# EAGLE board brains (EAGLE 7.3.0)
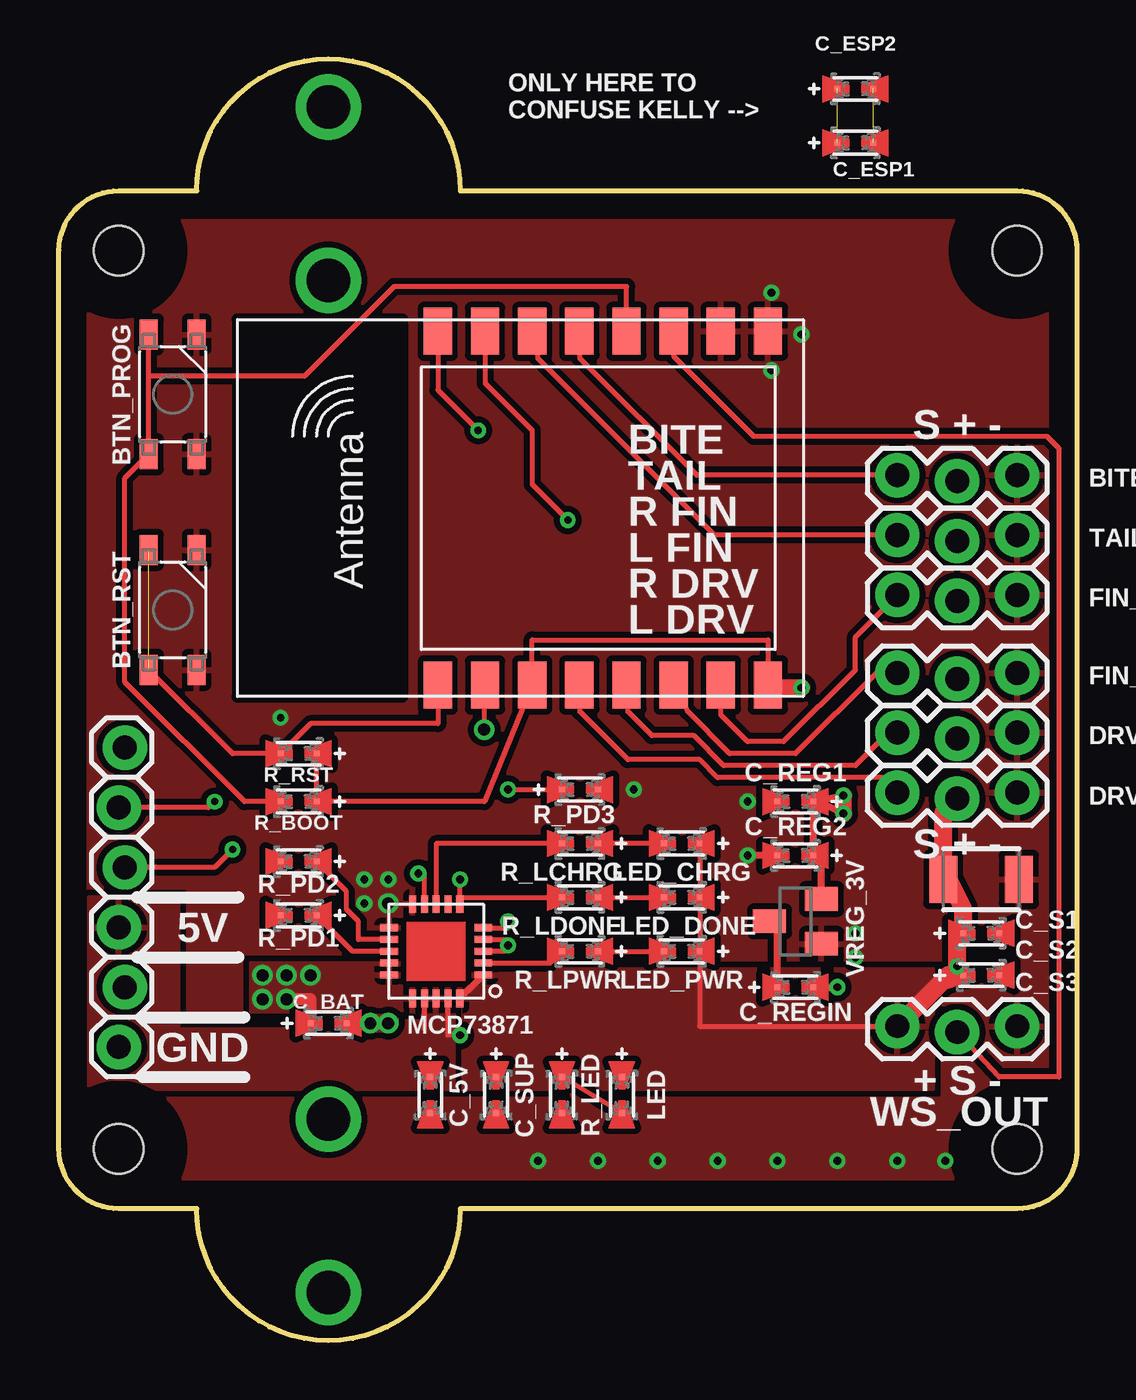
[diagram p0: board, top side]
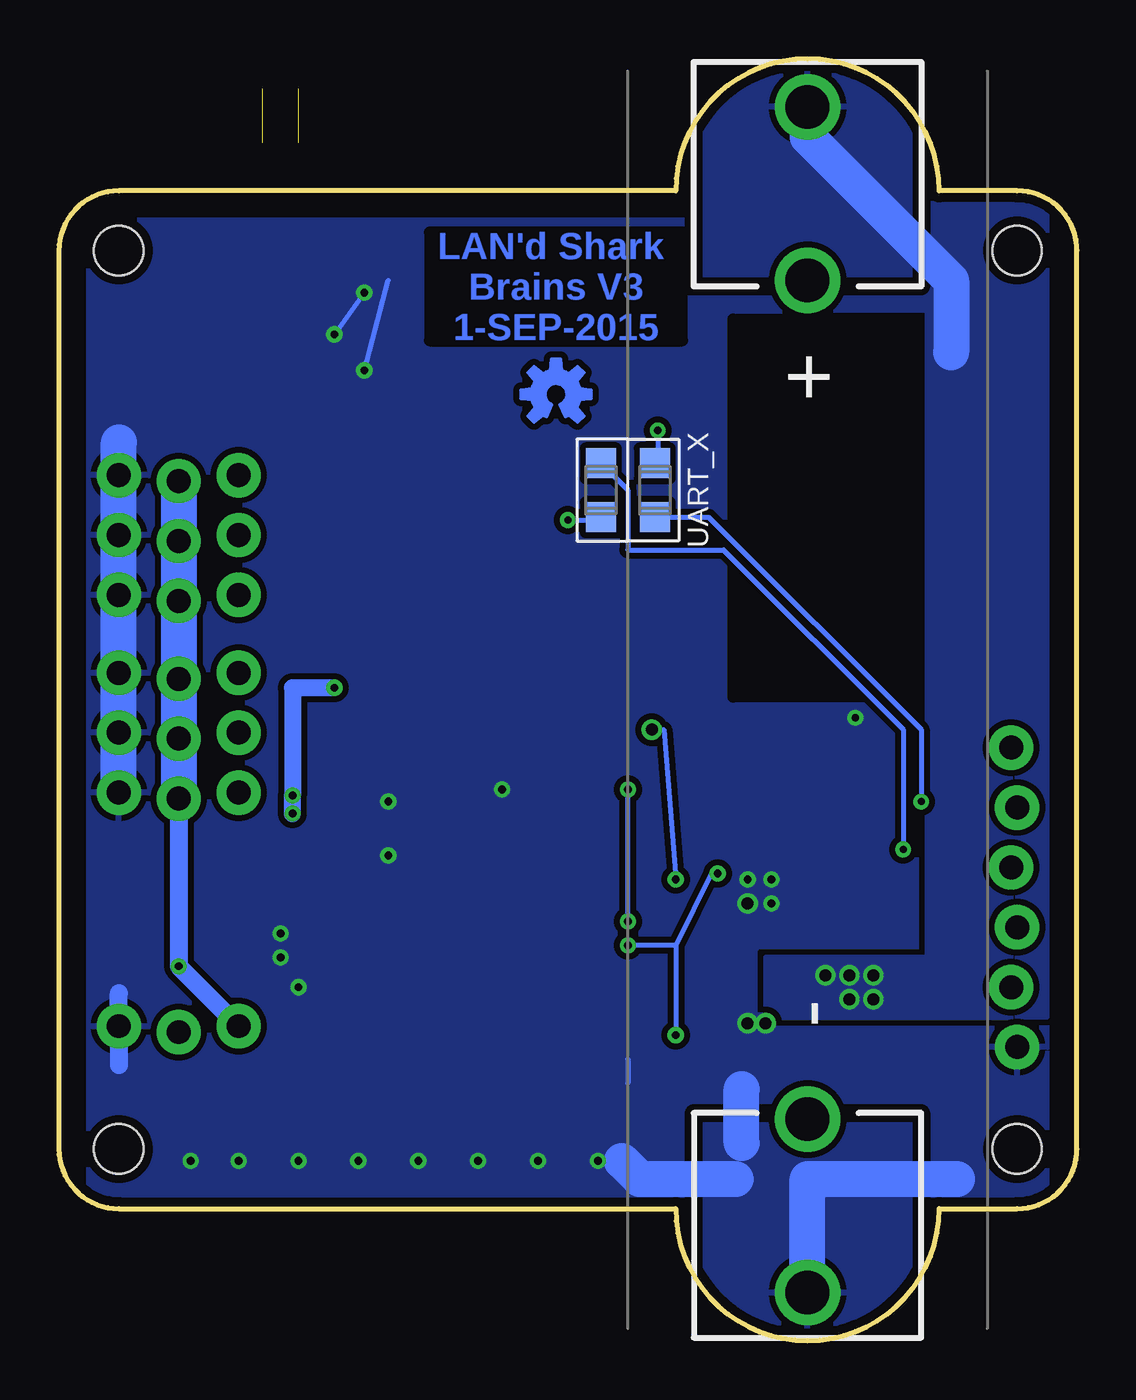
[diagram p1: board, bottom side, seen from below]

Size 43.18 x 54.36 mm. Coordinates in mm from the lower left corner, seen from the top.
Outline: 5.84,5.59 2.54,5.59 arc-90 0,8.13 0,46.23 arc-90 2.54,48.77 5.84,48.77 arc-90 11.43,54.36 arc-90 17.02,48.77 40.64,48.77 arc-90 43.18,46.23 43.18,8.13 arc-90 40.64,5.59 17.02,5.59 arc-90 11.43,0 arc-90 5.84,5.59
Copper layers (1*16): Top 0.0356mm / dielectric 1.5011mm / Bottom 0.0356mm
Design rules "LaenPCBOrder-tented": minimum track width 6mil, minimum drill 13mil, track to track 6mil, track to pad 6mil, pad to pad 6mil, via to via 6mil, smd to smd 0mil, copper to edge 15mil, drill to drill 6mil, minimum pad ring 7mil, minimum via ring 7mil, stop-mask expansion 4mil, vias tented up to drill 25mil, thermal gap 10mil
Holes 2.1 mm at 2.54,8.13 40.64,8.13 2.54,46.23 40.64,46.23
tRestrict: area 38.1,5.6 to 43.2,10.7; area 0,5.6 to 5.1,10.7; area 0,43.7 to 5.1,48.8; area 38.1,43.7 to 43.2,48.8

## Footprints (pad centres in the part's own frame; a part is rotated, then mirrored left to right if it is on the bottom)
BATTERY-AA = drill 1.854: GND@1 25.146,0; GND@2 17.78,0; PWR@1 -25.146,0; PWR@2 -17.78,0
1X03_LOCK = drill 1.016 pad 1.88: 1 0,0.127; 2 2.54,-0.127; 3 5.08,0.127
BUTTON-PJRC = smd 1.27 x 0.762: A1 -2.54,-1.016; A2 2.54,-1.016; B1 -2.54,1.016; B2 2.54,1.016
0402-0603-0805-UNIVERSAL = smd 0.254 x 0.254: + -0.762,0; - 0.762,0
1210 = smd 1.2 x 2: 1 -1.6,0; 2 1.6,0
1X06_LOCK = drill 1.016 pad 1.88: 1 0,0; 2 2.54,-0.254; 3 5.08,0; 4 7.62,-0.254; 5 10.16,0; 6 12.7,-0.254
QFN20 = smd 0.75 x 0.3: 1 -2,1; 2 -2,0.5; 3 -2,0; 4 -2,-0.5; 5 -2,-1; 11 2,-1; 12 2,-0.5; 13 2,0; 14 2,0.5; 15 2,1 | smd 0.3 x 0.75: 6 -1,-2; 7 -0.5,-2; 8 0,-2; 9 0.5,-2; 10 1,-2; 16 1,2; 17 0.5,2; 18 0,2; 19 -0.5,2; 20 -1,2
UART_SWITCHER_0603 = smd 1.27 x 1.27: RX_A -1.143,-1.143; RX_B -1.143,1.143; TX_A 1.143,1.143; TX_B 1.143,-1.143
SOT23 = smd 1 x 1.4: 1 -0.95,-1.1; 2 0.95,-1.1; 3 0,1.1
ESP-12 = smd 2 x 1.2: 1 -7.5,4.5; 2 -7.5,2.5; 3 -7.5,0.5; 4 -7.5,-1.5; 5 -7.5,-3.5; 6 -7.5,-5.5; 7 -7.5,-7.5; 8 -7.5,-9.5; 9 7.5,-9.5; 10 7.5,-7.5; 11 7.5,-5.5; 12 7.5,-3.5; 13 7.5,-1.5; 14 7.5,0.5; 15 7.5,2.5; 16 7.5,4.5

## Placement (x,y rotation side)
BAT2  [BATTERY-AA]  11.43,27.18 270 bottom
BITE  [1X03_LOCK]  35.56,36.58 0 top
BTN_PROG  BUTTONPJRC  [BUTTON-PJRC]  4.83,40.13 270 top
BTN_RST  BUTTONPJRC  [BUTTON-PJRC]  4.83,30.99 270 top
C_5V  10uF  [0402-0603-0805-UNIVERSAL]  15.75,10.41 270 top
C_BAT  10uF  [0402-0603-0805-UNIVERSAL]  11.43,13.46 0 top
C_ESP1  1uF  [0402-0603-0805-UNIVERSAL]  33.78,50.8 0 top
C_ESP2  0.1uF  [0402-0603-0805-UNIVERSAL]  33.78,53.09 0 top
C_REG1  10uF  [0402-0603-0805-UNIVERSAL]  31.24,22.86 180 top
C_REG2  1uF  [0402-0603-0805-UNIVERSAL]  31.24,20.57 180 top
C_REGIN  10uF  [0402-0603-0805-UNIVERSAL]  31.24,14.99 0 top
C_S1  220uF  [1210]  39.12,19.56 180 top
C_S2  10uF  [0402-0603-0805-UNIVERSAL]  39.12,17.27 0 top
C_S3  .1uF  [0402-0603-0805-UNIVERSAL]  39.12,15.49 0 top
C_SUP  10uF  [0402-0603-0805-UNIVERSAL]  18.54,10.41 270 top
DRV_L  [1X03_LOCK]  35.56,23.11 0 top
DRV_R  [1X03_LOCK]  35.56,25.65 0 top
FIN_L  [1X03_LOCK]  35.56,28.19 0 top
FIN_R  [1X03_LOCK]  35.56,31.5 0 top
FTDI  [1X06_LOCK]  2.79,25.15 270 top
IC_LIPO  MCP73871  [QFN20]  16,16.51 180 top
LED  [0402-0603-0805-UNIVERSAL]  23.88,10.41 270 top
LED_CHRG  [0402-0603-0805-UNIVERSAL]  26.42,21.08 180 top
LED_DONE  [0402-0603-0805-UNIVERSAL]  26.42,18.8 180 top
LED_PWR  [0402-0603-0805-UNIVERSAL]  26.42,16.51 180 top
LOGO1  OSHW-LOGOS  [OSHW-LOGO-S]  22.1,40.13 0 bottom
R_BOOT  [0402-0603-0805-UNIVERSAL]  10.16,22.86 180 top
R_LCHRG  [0402-0603-0805-UNIVERSAL]  22.1,21.08 180 top
R_LDONE  [0402-0603-0805-UNIVERSAL]  22.1,18.8 180 top
R_LED  [0402-0603-0805-UNIVERSAL]  21.34,10.41 270 top
R_LPWR  [0402-0603-0805-UNIVERSAL]  22.1,16.51 180 top
R_PD1  2k  [0402-0603-0805-UNIVERSAL]  10.16,18.03 180 top
R_PD2  100k  [0402-0603-0805-UNIVERSAL]  10.16,20.32 180 top
R_PD3  150k  [0402-0603-0805-UNIVERSAL]  22.1,23.37 0 top
R_RST  [0402-0603-0805-UNIVERSAL]  10.16,24.89 180 top
TAIL  [1X03_LOCK]  35.56,34.04 0 top
UART_X  UART_SWITCHER0603  [UART_SWITCHER_0603]  19.05,36.07 270 bottom
VREG_3V  MC1700T-3v0  [SOT23]  31.24,17.78 90 top
WS_OUT  [1X03_LOCK]  35.56,13.21 0 top
X1  [ESP-12]  20.57,35.31 90 top

## Library data of the parts
BAT2 = SparkFun-Electromechanical
BITE DRV_L DRV_R FIN_L FIN_R FTDI TAIL WS_OUT = SparkFun-Connectors
BTN_PROG BTN_RST C_5V C_BAT C_ESP1 C_ESP2 C_REG1 C_REG2 C_REGIN C_S1-C_S3 C_SUP LED LED_CHRG LED_DONE LED_PWR LOGO1 R_BOOT R_LCHRG R_LDONE R_LED R_LPWR R_PD1-R_PD3 R_RST UART_X VREG_3V = tekdemo
IC_LIPO X1 = adafruit

## Nets
3.0V: C_REG1.+ C_REG2.+ R_BOOT.+ R_RST.+ VREG_3V.2 X1.3 X1.8
4: TAIL.1 X1.14
5: BITE.1 X1.13
5V: C_5V.+ FTDI.4 IC_LIPO.3 IC_LIPO.4 IC_LIPO.9 IC_LIPO.17 IC_LIPO.18 IC_LIPO.19
12: FIN_L.1 X1.6
13: FIN_R.1 X1.7
14: DRV_R.1 X1.5
16: DRV_L.1 X1.4
BLINKY: WS_OUT.2 X1.11
BOOTLOADER: BTN_PROG.A1 BTN_PROG.A2 R_BOOT.- X1.12
CHARGE_DONE: IC_LIPO.6 R_LDONE.- X1.2
DTR: FTDI.1
ESP_RX_I: UART_X.TX_B X1.15
ESP_TX_O: UART_X.RX_B X1.16
FTDI_RX_I: FTDI.3 UART_X.RX_A
FTDI_TX_0: FTDI.2 UART_X.TX_A
GND: BAT2.GND@1 BITE.3 BTN_PROG.B1 BTN_PROG.B2 BTN_RST.B1 BTN_RST.B2 C_5V.- C_BAT.- C_REG1.- C_REG2.- C_REGIN.- C_S1.1 C_S2.- C_S3.- C_SUP.- DRV_L.3 DRV_R.3 FIN_L.3 FIN_R.3 FTDI.6 IC_LIPO.10 IC_LIPO.11 R_LED.- R_PD1.- R_PD2.- R_PD3.- TAIL.3 VREG_3V.1 WS_OUT.3 X1.9 X1.10
N$1: IC_LIPO.8 R_LCHRG.-
N$3: C_ESP1.- C_ESP2.-
N$4: IC_LIPO.5 R_PD3.+
N$5: LED_CHRG.- R_LCHRG.+
N$6: LED.- R_LED.+
N$7: LED_DONE.- R_LDONE.+
N$8: LED_PWR.- R_LPWR.+
N$9: IC_LIPO.2 R_LPWR.-
N$10: C_ESP1.+ C_ESP2.+
N$20: IC_LIPO.7
N$22: IC_LIPO.12 R_PD2.+
N$23: IC_LIPO.13 R_PD1.+
RESET: BTN_RST.A1 BTN_RST.A2 R_RST.- X1.1
VBAT: BAT2.PWR@1 C_BAT.+ IC_LIPO.14 IC_LIPO.15 IC_LIPO.16
VSUPPLY: BITE.2 C_REGIN.+ C_S1.2 C_S2.+ C_S3.+ C_SUP.+ DRV_L.2 DRV_R.2 FIN_L.2 FIN_R.2 IC_LIPO.1 IC_LIPO.20 LED.+ LED_CHRG.+ LED_DONE.+ LED_PWR.+ TAIL.2 VREG_3V.3 WS_OUT.1

## Tracks (layer width: path | path; a pad name or v marks a point on that pad's centre or on a via)
3.0V  (via drill 0.33)
  Top 0.203: R_RST.+ R_BOOT.+ 18.04,22.86 X1.3 20.07,29.72 30.07,29.72 X1.8
  Top 0.305: VREG_3V.2 32.34,20.24 C_REG2.+ C_REG1.+ 32.26,22.86 | 32.26,22.86 v33.27,22.35 | v33.27,23.11 32.26,22.86
  Top 0.711: v33.27,22.35 v33.27,23.11 | v31.5,27.69 30.19,27.69 X1.8
  Bottom 0.711: v31.5,27.69 33.27,27.69 v33.27,23.11 v33.27,22.35
4
  Top 0.203: TAIL.1 27.81,34.16 20.32,41.66 20.32,42.56 X1.14
5
  Top 0.203: BITE.1 27.05,36.7 22.1,41.66 22.1,42.78 X1.13
5V  (via drill 0.33)
  Top 0.203: IC_LIPO.9 15.5,19.8 v15.24,19.81 | IC_LIPO.3 19.05,16.51 v19.05,16.76 19.05,17.01 IC_LIPO.4 | v17.02,12.95 16.5,12.95 IC_LIPO.19 | IC_LIPO.17 15.49,13.21
  Bottom 0.203: v15.24,19.81 15.49,19.81 17.02,16.76 | 17.02,16.76 v19.05,16.76 | 17.02,16.76 v17.02,12.95
  pour Top (isolate 0.254, rank 3): 16.76,15.24 14.73,15.24 14.73,13.21 5.08,13.21 5.08,18.8 1.27,18.8 1.27,10.67 16.76,10.67
12
  Top 0.203: FIN_L.1 34.67,28.32 31.24,24.89 28.45,24.89 26.67,26.67 X1.6
13
  Top 0.203: FIN_R.1 33.78,29.84 33.78,28.45 30.73,25.4 29.21,25.4 28.07,26.54 X1.7
14
  Top 0.203: DRV_R.1 35.18,25.78 33.78,24.38 28.19,24.38 26.92,25.65 25.15,25.65 24.13,26.67 24.13,27.75 X1.5
16
  Top 0.203: X1.4 22.1,27.78 22.1,26.67 24.13,24.64 27.18,24.64 27.94,23.88 34.93,23.88 DRV_L.1
BLINKY
  Top 0.203: X1.11 26.07,41.74 29.46,38.35 41.91,38.35 42.42,37.85 42.42,11.18 39.88,11.18 WS_OUT.2
BOOTLOADER
  Top 0.203: 3.81,40.89 BTN_PROG.A2 2.79,36.58 2.79,27.94 7.87,22.86 R_BOOT.- | 3.81,40.89 BTN_PROG.A1 | X1.12 24.07,44.7 14.22,44.7 10.41,40.89 3.81,40.89
CHARGE_DONE  (via drill 0.33, 0.51)
  Top 0.203: R_LDONE.- 17,18.8 IC_LIPO.6 17,19.56 v17.02,19.56 | X1.2 18.03,27.81 v18.03,25.91
  Bottom 0.203: v18.03,25.91 17.53,25.91 v17.02,19.56
ESP_RX_I  (via drill 0.3)
  Top 0.203: X1.15 18.07,40.6 20.07,38.61 20.07,36.32 v21.59,34.8
  Bottom 0.203: v21.59,34.8 20.32,34.8 UART_X.TX_B
ESP_TX_O  (via drill 0.3)
  Top 0.203: X1.16 16.07,40.31 v17.78,38.61
  Bottom 0.203: v17.78,38.61 17.78,37.34 UART_X.RX_B
FTDI_RX_I  (via drill 0.3)
  Top 0.203: v7.37,20.83 6.6,20.07 FTDI.3
  Bottom 0.203: UART_X.RX_A 19.05,36.07 19.05,33.53 14.99,33.53 7.37,25.91 v7.37,20.83
FTDI_TX_0  (via drill 0.3)
  Top 0.203: v6.6,22.86 6.35,22.61 FTDI.2
  Bottom 0.203: UART_X.TX_A 15.62,34.93 6.6,25.91 v6.6,22.86
GND  (via drill 0.3, 0.33, 0.51)
  Top 0.203: X1.9 29.97,42.81
  Top 0.305: C_REG2.- v29.21,20.57 | C_REGIN.- v33.02,14.99
  Top 0.508: v13.21,13.46 C_BAT.- v13.97,13.46
  Bottom 0.203: 19.05,11.94 19.05,10.92 | v31.5,42.67 v30.23,44.45 | v30.23,41.15 29.21,44.96
  Bottom 0.762: 40.64,11.68 WS_OUT.3 40.64,14.73
  Bottom 1.524: 40.64,23.11 40.64,38.1 | 19.3,7.62 18.54,6.86 14.48,6.86 | BAT2.GND@1 11.43,6.86 5.08,6.86 | 14.22,8.38 14.22,10.67
  other vias: 13.97,18.54 20.32,7.62 22.86,7.62 25.4,7.62 27.94,7.62 30.48,7.62 33.02,7.62 35.56,7.62 37.59,7.62 12.95,19.56 13.97,19.56 12.95,18.54 24.38,23.37 29.21,22.86 33.78,17.27 33.78,16.26 9.4,26.42
  pour Top (isolate 0.254, rank 6): 1.27,6.86 1.27,47.5 41.91,47.5 41.91,6.86
  pour Bottom (isolate 0.254, rank 6): 1.27,0.51 1.27,47.5 41.91,47.5 41.91,0.51
N$1
  Top 0.203: R_LCHRG.- 16,21.08 IC_LIPO.8
N$3  (1 unrouted)
N$4  (via drill 0.33)
  Top 0.203: IC_LIPO.5 19.05,17.51 v19.05,17.78 | v19.05,23.37 R_PD3.+
  Bottom 0.203: v19.05,17.78 v19.05,23.37
N$5
  Top 0.203: LED_CHRG.- R_LCHRG.+
N$6
  Top 0.203: LED.- R_LED.+
N$7
  Top 0.203: R_LDONE.+ LED_DONE.-
N$8
  Top 0.203: R_LPWR.+ LED_PWR.-
N$9
  Top 0.203: IC_LIPO.2 20.84,16.01 R_LPWR.-
N$10  (1 unrouted)
N$22
  Top 0.203: IC_LIPO.12 12.71,17.01 12.71,17.77 12.19,18.29 12.2,19.04 R_PD2.+
N$23
  Top 0.203: IC_LIPO.13 12.45,16.51 R_PD1.+
RESET  (1 unrouted)
  Top 0.203: X1.1 16.07,26.16 10.67,26.16 R_RST.- 7.37,24.89 BTN_RST.A2
VBAT  (via drill 0.51)
  Top 0.508: C_BAT.+ 10.67,14.48 v9.65,14.48
  Bottom 0.203: BAT2.PWR@1 11.43,51.05
  Bottom 1.524: 11.43,51.05 5.33,44.96 5.33,41.91
  other vias: 9.65,15.49 8.64,15.49 10.67,15.49 8.64,14.48
  pour Bottom (isolate 0.254): 16.26,54.61 1.27,54.61 1.27,13.72 6.35,13.72 6.35,43.69 16.26,43.69
  pour Top (isolate 0.254): 15.24,13.97 15.24,16 8.13,16 8.13,13.97
  pour Bottom (isolate 0.254): 1.27,13.72 1.27,16.26 13.21,16.26 13.21,13.72
VSUPPLY  (via drill 0.33)
  Top 0.203: LED_CHRG.+ LED_DONE.+ LED_PWR.+ 27.18,13.34 WS_OUT.1
  Top 0.305: IC_LIPO.20 IC_LIPO.1 | C_REGIN.+ 30.48,17.44 VREG_3V.3
  Top 0.762: C_S3.+ 37.72,15.49 WS_OUT.1 | v38.1,15.88 38.1,17.02 C_S2.+ 38.35,18.29 37.59,19.81 | C_S1.2 37.52,22.4 DRV_L.2
  Bottom 0.762: DRV_L.2 v38.1,15.88 WS_OUT.1
  Bottom 1.524: BITE.2 TAIL.2 FIN_R.2 FIN_L.2 DRV_R.2 DRV_L.2
  pour Top (isolate 0.254, rank 5): 16.76,15.75 16.76,10.67 37.08,10.67 37.08,15.75

## Text on the board
Bottom: LAN'd Shark / Brains V3 / 1-SEP-2015
tPlace: ONLY HERE TO / CONFUSE KELLY --> | S + - | BITE / TAIL / R FIN / L FIN / R DRV / L DRV | S + - | 5V | GND | + S -
tStop: SHARK / BRAINS!
bStop: LAN'd Shark / Brains V3 / 1-SEP-2015